# Altium PCB PCB1.PcbDoc
Units mil, origin at the board's own origin, x right, y up, seen from the top; angles counter-clockwise.
Board outline 3130 x 3175 mil, 2 copper layers (Top Layer, Bottom Layer); 28 components, 34 nets, 112 pads, 6 vias.
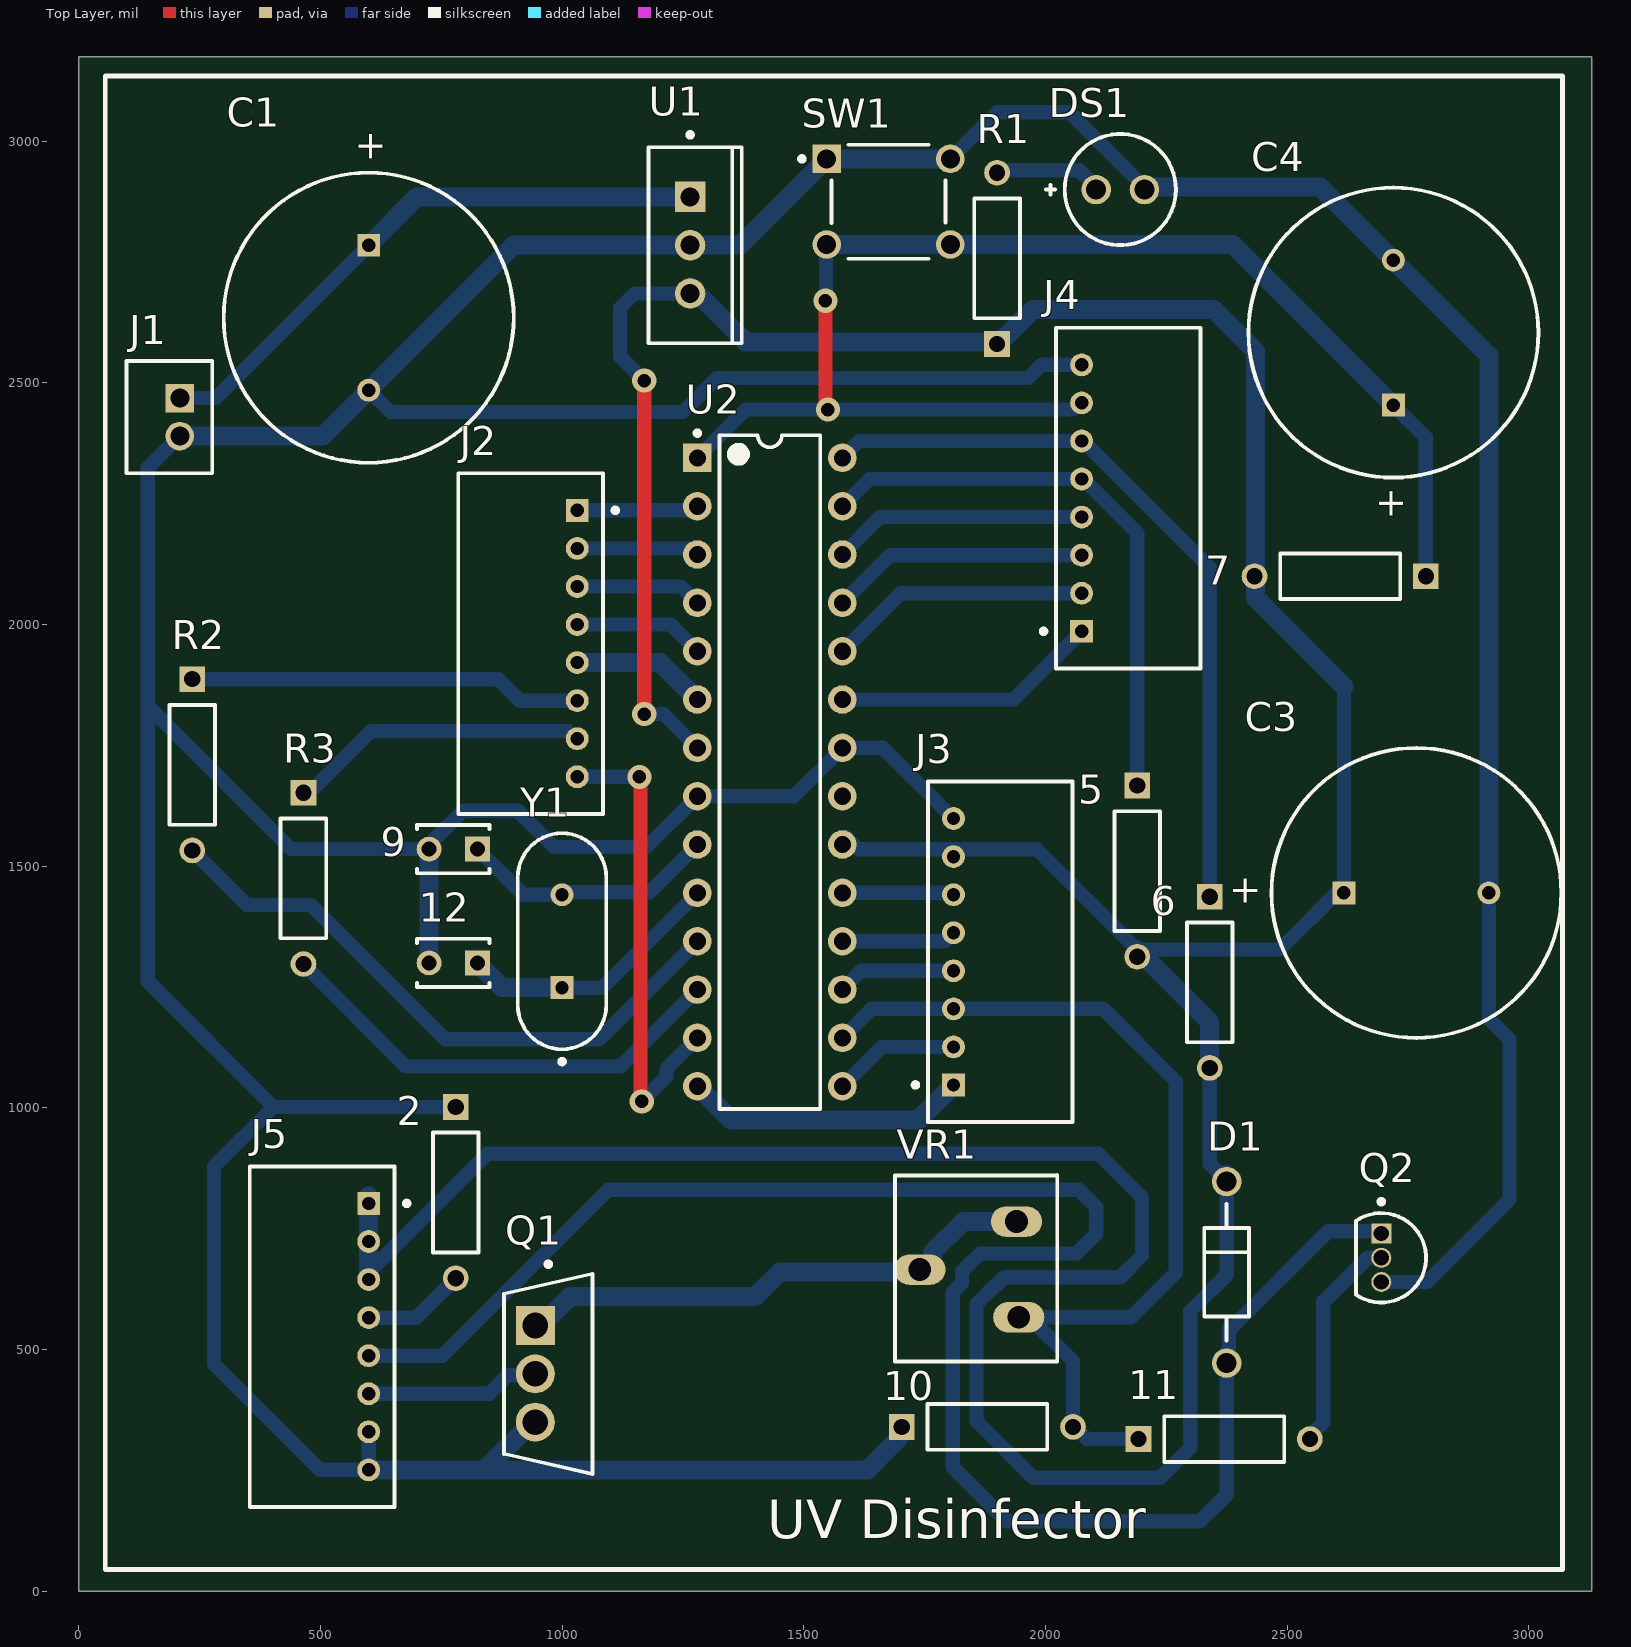
[diagram p0: Top Layer view]
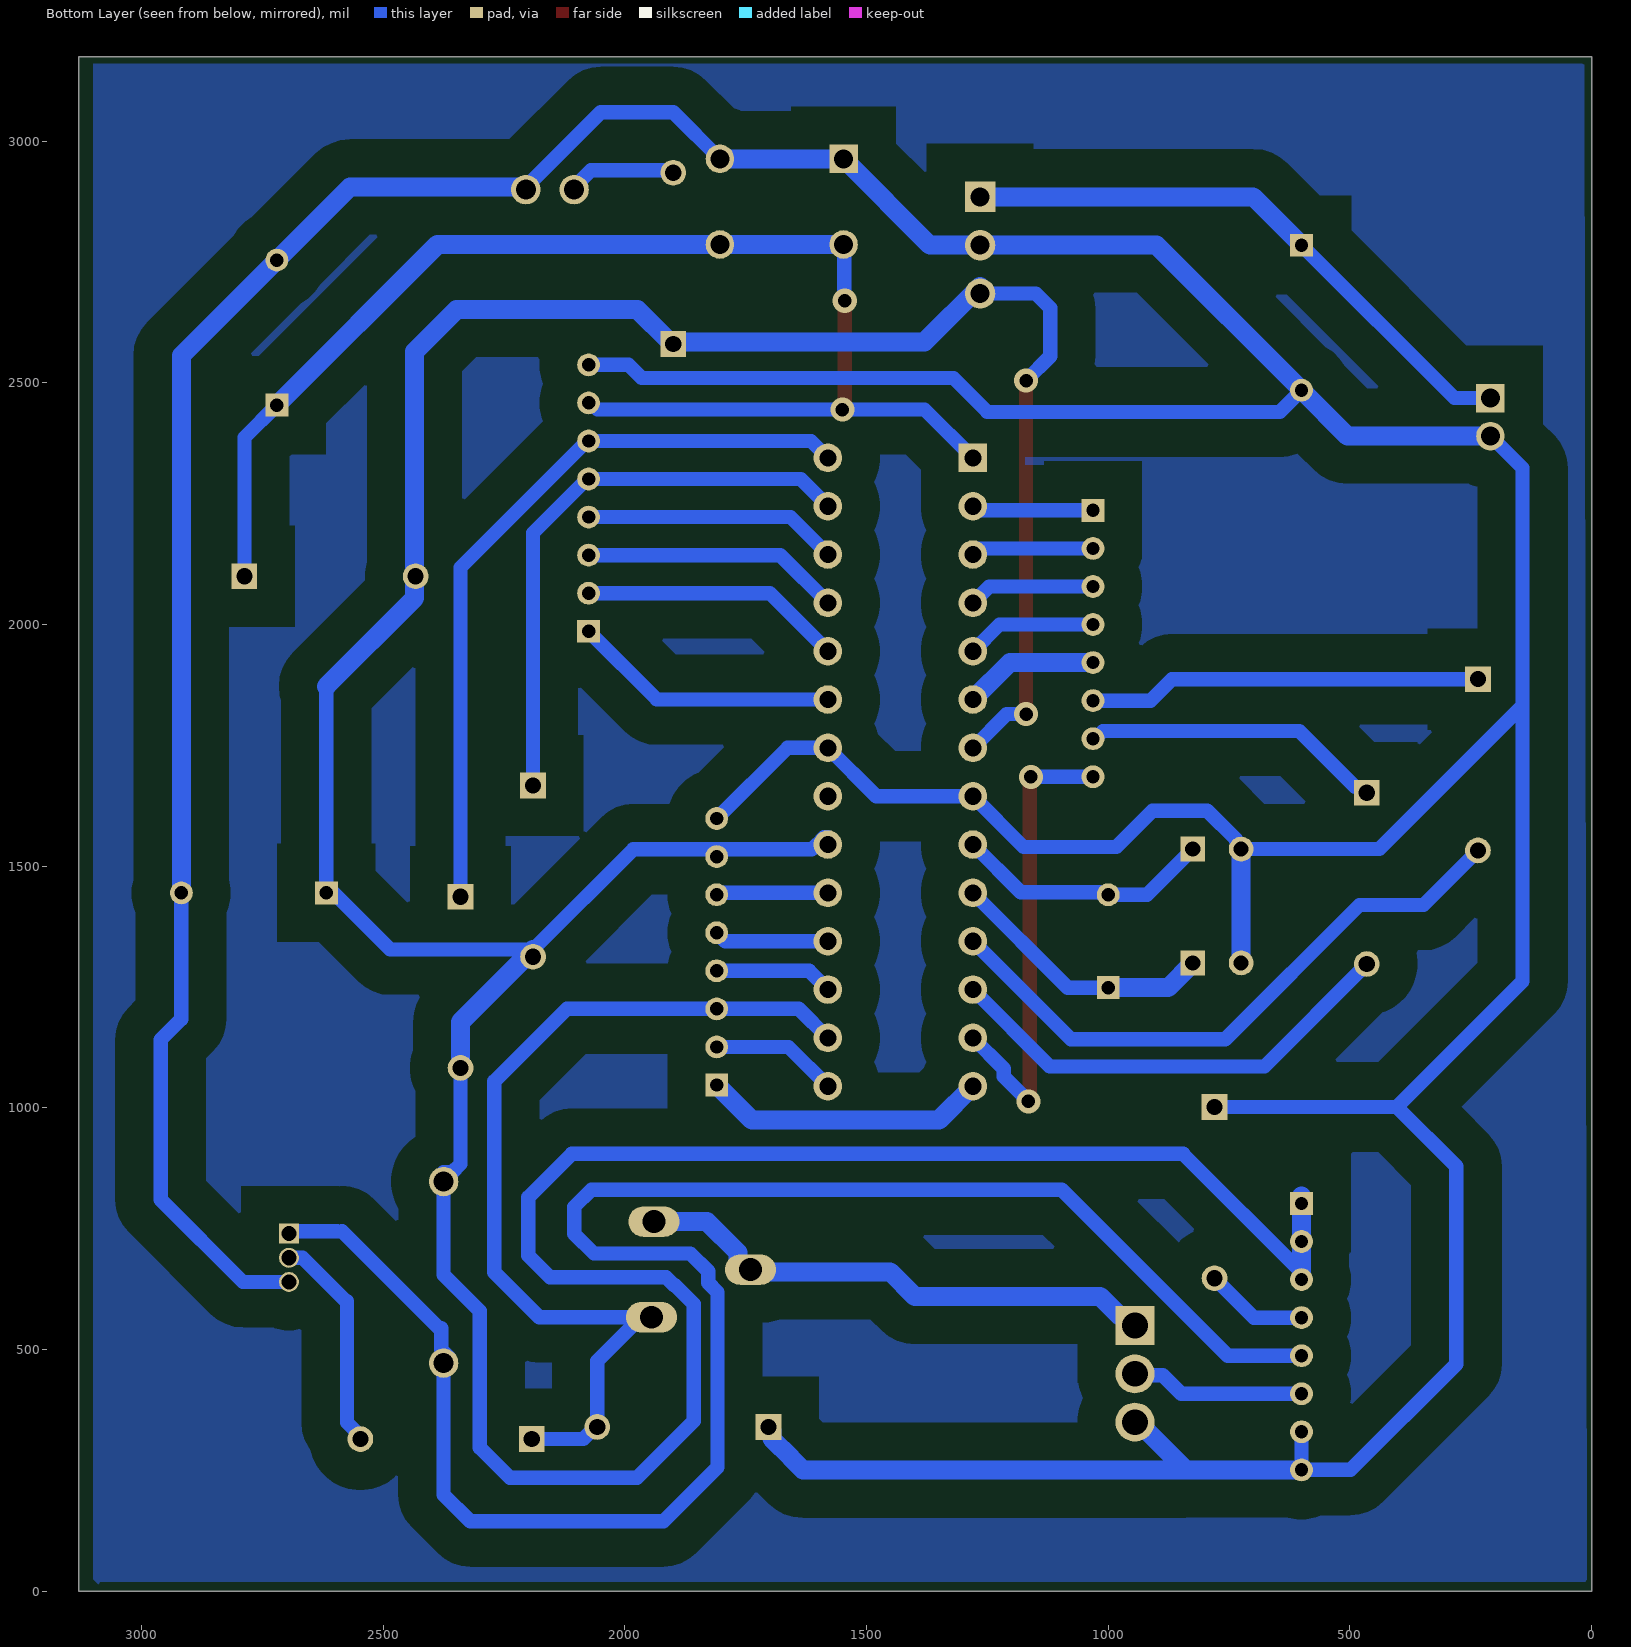
[diagram p1: Bottom Layer view, seen from below]

## Layer stack, top to bottom
Top Solder: solder mask 0.4, Solder Resist, Dk 3.5
Top Layer: signal copper 1.4
Dielectric 1: dielectric 12.6, FR-4, Dk 4.8
Bottom Layer: signal copper 1.4
Bottom Solder: solder mask 0.4, Solder Resist, Dk 3.5

## Board outline
0,0 3130,0 3130,3175 0,3175

## Design rules (kind name [scope] priority, off if disabled: settings)
Clearance [All] p1: gap=19.68 ignorepadtopadclearanceinfootprint=FALSE
PolygonConnect [All] p1: connectstyle=Relief reliefconductorwidth=10 reliefentries=4 polygonreliefangle="90 Angle" airgapwidth=10
RoutingVias [All] p1: holewidth=28 width=50 viastyle="Through Hole" minholewidth=28 minwidth=50 maxholewidth=28 maxwidth=50
SolderMaskExpansion [All] p1: expansion=4 istentingtop=FALSE
Width [All] p1: maxlimit=39.37 minlimit=19.68 preferedwidth=29.53
30 further rules are at their usual default settings.

## Classes and differential pairs
component class UV_Sheet1: 5 6 7 9 10 11 12 C1 C3 C4 D1 DS1 J1 J2 J3 J4 J5 Q1 R1 R2 R3 SW1 U1 U2 VR1 Y1

## Components (designator, comment, footprint, x,y, rotation, side; value= is the part's Value field where it differs from the comment)
2 "MFR-25FBF52-100K" RESA60-630X240 780,825 r270 top
5 "MFR-25FBF52-100K" RESA60-630X240 2190,1490 r270 top
6 "MFR-25FBF52-100K" RESA60-630X240 2340,1260 r270 top
7 "MFR-25FBF52-100K" RESA60-630X240 2610,2100 r180 top
9 "C315C220K1G5TA" KEMT-C315-THT-2 775,1535.65 r180 top
10 "MFR-25FBF52-100K" RESA60-630X240 1880,340 r0 top
11 "MFR-25FBF52-100K" RESA60-630X240 2370,315 r0 top
12 "C315C220K1G5TA" KEMT-C315-THT-2 775,1300 r180 top
C1 "Cap Pol1" RB7.6-15 600,2635 r90 top value=330nf
C3 "Cap Pol1" RB7.6-15 2767.59,1445 r180 top value=100nF
C4 "Cap Pol1" RB7.6-15 2720,2604.09 r270 top value=10uF
D1 "1N4001" ONSC-AXIAL_LEAD-2-59-10_P 2375,660 r270 top
DS1 "HLMP-4740" AVAG-HLMP-4740 2155,2900 r0 top
J1 "B2B-PH-K-S(LF)(SN)" JST-B2B-PH-K-S_V 187.55,2429.37 r270 top
J2 "S8B-PH-K-S(LF)(SN)" FP-S8B-PH-K-S_LF_SN-MFG 935,1960.82 r90 top
J3 "S8B-PH-K-S(LF)(SN)" FP-S8B-PH-K-S_LF_SN-MFG 1906.46,1323.15 r270 top
J4 "S8B-PH-K-S(LF)(SN)" FP-S8B-PH-K-S_LF_SN-MFG 2171.5,2261.85 r270 top
J5 "S8B-PH-K-S(LF)(SN)" FP-S8B-PH-K-S_LF_SN-MFG 503.54,526.85 r90 top
Q1 "IRF530PBF" FP-X15-0364-MFG 971.59,450 r0 top
Q2 "BC547B" ONSC-TO-92-3-29-11 2695,690 r270 top
R1 "MFR-25FBF52-100K" RESA60-630X240 1900,2757.83 r90 top
R2 "MFR-25FBF52-100K" RESA60-630X240 235,1710 r270 top
R3 "MFR-25FBF52-100K" RESA60-630X240 465,1475 r270 top
SW1 "1825910-6" TECO-1825910-6_V 1675.42,2875 r0 top
U1 "MC7805CTG" ONSC-TO-220-3-221AB-01 1265,2785 r0 top
U2 "ATmega328-PU" 28P3 1430,1695 r0 top
VR1 "VRes" VerRes 1852.4,516.97 r90 top
Y1 "FOXSLF/080-20" FOX-FOXSLF080-20 1000,1345 r90 top

## Footprints (in the part's own frame and the unit in brackets; to place one, negate y for a bottom-side part, rotate by r counter-clockwise, add the part's x,y. Pads: shape width x height; smd on the part's side, far side on the other; paste and mask are expansions set on the pad)
28P3 [mm] "28-Pin Plastic Dual In-Line Package (PDIP)"
  rect 1.5x1.5 hole 0.9: 1(-3.81,16.51)
  round 1.5 hole 0.9: 2(-3.81,13.97) 3(-3.81,11.43) 4(-3.81,8.89) 5(-3.81,6.35) 6(-3.81,3.81) 7(-3.81,1.27) 8(-3.81,-1.27) 9(-3.81,-3.81) 10(-3.81,-6.35) 11(-3.81,-8.89) 12(-3.81,-11.43) 13(-3.81,-13.97) 14(-3.81,-16.51) 15(3.81,-16.51) 16(3.81,-13.97) 17(3.81,-11.43) 18(3.81,-8.89) 19(3.81,-6.35) 20(3.81,-3.81) 21(3.81,-1.27) 22(3.81,1.27) 23(3.81,3.81) 24(3.81,6.35) 25(3.81,8.89) 26(3.81,11.43) 27(3.81,13.97) 28(3.81,16.51)
  silkscreen extent -3.93,-17.7 2.65,17.93, body extent -3.6,-17.65 3.6,17.65, height 4.58
AVAG-HLMP-4740 [mm] "THD, 2-Leads, Dia 5.845mm, Pitch 2.54mm"
  round 1.55 hole 1.05: 1(-1.27,0) 2(1.27,0)
  silkscreen extent -3.92,-2.92 2.92,2.92
FOX-FOXSLF080-20 [mm] "THD, 2-Leads, Body 11.35x4.65mm"
  rect 1.2x1.2 hole 0.7: 1(-2.44,0)
  round 1.2 hole 0.7: 2(2.44,0)
  silkscreen extent -6.45,-2.33 5.67,2.33, body extent -5.68,-2.33 5.68,2.33, height 3.6
FP-S8B-PH-K-S_LF_SN-MFG [mm]
  rect 1.2x1.2 hole 0.7 paste-1000 mask+0: 1(7,-2.45)
  round 1.2 hole 0.7 paste-1000 mask+0: 2(5,-2.45) 3(3,-2.45) 4(1,-2.45) 5(-1,-2.45) 6(-3,-2.45) 7(-5,-2.45) 8(-7,-2.45)
  silkscreen extent -8.95,-4.58 8.95,3.8, body extent -9.05,-3.9 9.05,3.9, height 0.25
FP-X15-0364-MFG [mm]
  rect 2.05x2.05 hole 1.35 paste-1000 mask+0: 1(-0.685,2.54)
  round 2.05 hole 1.35 paste-1000 mask+0: 2(-0.685,0) 3(-0.685,-2.54)
  silkscreen extent -2.33,-5.26 2.33,5.88, body extent -2.42,-5.36 2.42,5.36, height 0.25
JST-B2B-PH-K-S_V [mm] "Connector, 2-Leads, Body 5.9x4.5mm, Pitch 2mm"
  rect 1.5x1.5 hole 1: 1(-1,0.55)
  round 1.5 hole 1: 2(1,0.55)
  silkscreen extent -2.95,-2.25 2.95,2.25, body extent -2.95,-2.25 2.95,2.25, height 6
KEMT-C315-THT-2 [mm] "THD, 2-Leads, Body 3.81x2.54mm"
  rect 1.3x1.3 hole 0.8: 1(-1.27,0)
  round 1.3 hole 0.8: 2(1.27,0)
  silkscreen extent -1.91,-1.27 1.91,1.27, body extent -1.91,-1.27 1.91,1.27, height 4.66
ONSC-AXIAL_LEAD-2-59-10_P [mm] "AXIAL, 2-Leads, Diameter 2.35mm"
  round 1.55 hole 1.05: 1(-4.77,0) 2(4.77,0)
  silkscreen extent -3.6,-1.18 3.6,1.18
ONSC-TO-92-3-29-11 [mm] "TO, 3-Leads, Body Dia 4.7mm, Pitch 1.27mm"
  rect 1.05x1.05 hole 0.8: 1(-1.27,0)
  round 1.05 hole 0.8: 2(0,0) 3(1.27,0)
  silkscreen extent -3.07,-1.34 2.35,2.35, body extent -2.35,-1.33 2.36,2.36, height 7.87
ONSC-TO-220-3-221AB-01 [mm] "FM, 3-Leads, Body 10.3x4.85mm, Pitch 2.54mm"
  rect 1.6x1.6 hole 1: 1(0,2.54)
  round 1.6 hole 1: 2(0,0) 3(0,-2.54)
  silkscreen extent -2.19,-5.15 2.72,5.92, body extent -2.16,-5.15 2.69,5.15, height 19.68
RB7.6-15 [mm] "Polarized Capacitor (Radial); 2 Leads"
  rect 1.2x1.2 hole 0.7: 1(3.81,0)
  round 1.2 hole 0.7: 2(-3.81,0)
  silkscreen extent -7.62,-7.62 7.62,7.62
RESA60-630X240 [mm] "Axial Resistor, 2-Leads, Dia 2.4mm, Body Length 6.3mm"
  rect 1.35x1.35 hole 0.85: 1(-4.5,0)
  round 1.35 hole 0.85: 2(4.5,0)
  silkscreen extent -3.15,-1.2 3.15,1.2, body extent -3.15,-1.2 3.15,1.2, height 2.4
TECO-1825910-6_V [mm] "Switch, 4-Leads, Body 5.99x5.99mm"
  rect 1.5x1.5 hole 0.99: 1(-3.25,2.25)
  round 1.5 hole 0.99: 2(3.25,2.25) 3(-3.25,-2.25) 4(3.25,-2.25)
  silkscreen extent -4.67,-3 2.99,3, body extent -3,-2.99 2.99,3, height 5
VerRes [mm]
  oval 1.6x2.692 hole 1.2: 1(1.275,-2.35) 2(3.775,2.85) 3(6.3,-2.225)
  silkscreen extent -1.05,-4.38 8.75,4.15, body extent 0.5,-3.52 7,3.52, height 7.41

## Part data
2 5 6 7 10 11 R1 R2 R3: library part CMP-1659-00073-1, "Axial Resistor, 100 KOhm, +/- 1%, 0.25 W, -55 to 155 degC, 2-Pin THD, RoHS, Bulk", Case\Package=Axial, Max Operating Temperature="155 degC", Min Operating Temperature="-55 degC", Package Quantity=200, Power Rating="250 mW", Resistance="475 Ohm", Tolerance=1%, Voltage Rating="250 V", ComponentLink1Description="Manufacturer URL", ComponentLink1URL=http://www.yageo.com/, ComponentLink2Description=Datasheet, ComponentLink2URL=http://www.yageo.com/documents/recent/Yageo%20LR_MFR_2013.pdf, DatasheetVersion=Apr-13, Length="0.248 inch", Mount="Through Hole", PackageDescription="2-Pin Axial Lead, Dia 2.4 mm, Body Length 6.3 mm", PackageReference=MFR-25, Packaging=Bulk, RoHSCompliant=true
9 12: library part CMP-1664-00008-1, "Capacitor, Ceramic, 22 pF, +/-10 %, 100 V, -55 to 125 degC, 2-Pin THD, RoHS, Bulk", Case\Package=TO-220, Max Input Voltage="40 V", Max Operating Temperature="125 degC", Max Ouput Current="1.5 A", Min Input Voltage="4.2 V", Min Operating Temperature="0 degC", Output Voltage="1.2 V", Package Quantity=50, ComponentLink1Description="Manufacturer URL", ComponentLink1URL=http://www.kemet.com/, ComponentLink2Description=Datasheet, ComponentLink2URL=http://capacitoredge.kemet.com/capedge2/DataSheet/Datasheet-C315C220K1G5TA.pdf?pn=C315C220K1G5TA{BULK}, DatasheetVersion=Aug-16, Height="9.28 mm", Length="10.28 mm", Mount="Through Hole", Output Current="1.5 A", Outputs=1, PackageDescription="2-Pin Through Hole Device, Body 3.81 x 2.54 mm", PackageReference=C315-THT-2, Packaging=Rail/Tube, Pins=3, Radiation Hardening=No, REACH SVHC="No SVHC", RoHSCompliant=true, Weight="0.08113 oz", Width="4.82 mm"
C1 C3 C4: "Polarized Capacitor (Radial)", LatestRevisionDate=17-Jul-2002, LatestRevisionNote="Re-released for DXP Platform.", PackageDescription="Polarized Capacitor (Radial); 2 Leads", PackageReference=RB7.6-15, Published=8-Jun-2000, Publisher="Altium Limited"
D1: library part CMP-0902-00117-1, "Standard Recovery Rectifier, 2-Pin Axial_Lead, Pb-Free, Bulk Bag", Manufacturer="On Semiconductor", ComponentLink1Description="Manufacturer URL", ComponentLink1URL=http://www.onsemi.com/, ComponentLink2Description=Datasheet, ComponentLink2URL=http://www.onsemi.com/pub_link/Collateral/1N4001-D.PDF, ComponentLink3Description="Package Specification", ComponentLink3URL=http://www.onsemi.cn/pub_link/Collateral/59-10.PDF, DatasheetVersion="Rev. 13", IFSM Max (A)=30, IO(rec) Max (A)=1, Mounting Technology="Through Hole", PackageDescription="2-Pin, Axial Lead, Diameter 2.35 mm", PackageReference=AXIAL_LEAD-2-59-10, PackageVersion="Rev. U, 02/2005", Packing="Bulk Bag", PartNumber=1N4001, RoHS=TRUE, Type="Standard Recovery", VRRM Max (V)=50
DS1: library part CMP-2000-06413-1, "T-1 3/4 (5 mm) Low Current LED Lamp, Green, 1.9 V, -20 to 100 degC, 2-Pin THD, RoHS, Bulk", Color=Green, Dominant Wavelength/Color Temperature=569nm, Manufacturer=AvagoTechnologies, Package=2T-13/4, Package Description="2-Pin Through Hole Device, Dia 5.845 mm, Pitch 2.54 mm", Category=LEDs, Datasheet URL=http://docs.avagotech.com/docs/AV02-1557EN, Datasheet Version=07/2014, Intensity=2.3mcd, Lens Appearance=ColoredDiffused, Lens Shape Type=Circular, Manufacturer URL=http://www.avagotech.com/, Mounting=ThroughHole, Mounting Orientation=TopMount, Mounting Technology=ThroughHole, Number of LEDs=1, Package Reference=HLMP-4740, Packaging=Bulk, Peak Wavelength=565nm, Pin Count=2, Rad Hard=No, Type=Uni-Color, Viewing Angle=50°
J1: library part CMP-2000-05162-1, "Male Header, Pitch 2 mm, 1 x 2 Position, Height 6 mm, Tail Length 3.4 mm, -25 to 85 degC, RoHS, Bulk", Manufacturer=JST, Datasheet URL=http://datasheet.octopart.com/B2B-PH-K-S%28LF%29%28SN%29-JST-datasheet-8324864.pdf, Datasheet Version=Nov-08, Manufacturer URL=http://www.jst.com/home2.html, No of Positions=2, Pitch=2mm, Style/Orientation=StraightHeader/Plug, Termination=Crimp, Type=ShroudedHeader
J2 J3 J4 J5: library part CMP-17439-000161-1, "CONN HEADER R/A 8POS 2MM", Color=White, Contact Resistance=20mR, Current Rating=2A, Flammability Rating="UL94 V-0", Insulation Color=Natural, Insulation Resistance=1GR, Max Operating Temperature=85°C, Max Voltage Rating (AC)=100V, Min Operating Temperature=-25°C, Connector Type=Header, Contact Finish - Mating=TIN, Contact Material=Brass, Contact Mating Length=0.13inch, Contact Plating=Tin, Contact Shape=Square, Contact Type="Male Pin", Depth=7.6mm, Fastening Type=Detent, Gender=Male, Height=9.4mm, Housing Color=White, Housing Material=Polyamide, Insulation Material=Nylon, Lead Free="Lead Free", Lead Pitch=2mm, Length=17.9mm, Max Current Rating=2A, Mount="Through Hole", Number of Contacts=8, Number of Pins=8, Number of Poles=8, Number of Positions=8, Number of Rows=1, Orientation="Right Angle", Packaging=Bulk, Pitch=2mm, REACH SVHC="No SVHC", Series=PH, Termination=Solder, Voltage Rating=100V, Voltage Rating (AC)=100V, Width=4.5mm, Working Voltage=100V
Q1: library part CMP-02550-000190-1, "MOSFET N-CH 100V 14A TO-220AB", Continuous Drain Current=14A, Drain To Source Breakdown Voltage=100V, Drain To Source Resistance=0.16Ω, Gate To Source Voltage=20V, Input Capacitace At Vds="670pF @ 25V", Manufacturer=Vishay, Max Forward Diode Voltage=2.5V, Max Junction Temp=+175°C, Package=X15-0364, Power Dissipation=88W, Pulse Drain Current=56A, Temperature="-55°C to +175°C", Temperature Range Low=-55°C, Automotive=No, Category=Trans, ComponentLink2Description=Datasheet, ComponentLink2URL=http://www.vishay.com/docs/91019/91019.pdf, Depletion Mode=False, Device Class L1="Discrete Semiconductors", Device Class L2=Transistors, Device Class L3=MOSFETs, Digikey Description="MOSFET N-CH 100V 14A TO-220AB", Drain To Source Voltage=100V, Gate Charge At Vgs="26nC @ 10V", Height=19.89mm, Lead Free=Yes, Manufacturer Part Number=IRF530PBF, Mouser Description="MOSFET N-Chan 100V 14 Amp", Number Of Channels=1, Number Of N Channels=1, Octopart=https://octopart.com/irf530pbf-vishay-46547999, Reverse Recovery Charge=850nC, Reverse Recovery Time=150ns, RoHS=TRUE, Rthja Max=62°C/W, Standoff Height=3.33mm, Temperature Range High=+175°C, Threshold Vgs Max=4V, Threshold Vgs Min=2V, Turn Off Delay Time=23ns, Turn On Delay Time=10ns
Q2: library part CMP-1048-01467-1, "Amplifier Transistor, NPN Silicon, 3-Pin TO-92, Bulk Box", Manufacturer="On Semiconductor", ComponentLink1Description="Manufacturer URL", ComponentLink1URL=http://www.onsemi.com/, ComponentLink2Description=Datasheet, ComponentLink2URL=http://www.onsemi.com/pub_link/Collateral/BC546-D.PDF, ComponentLink3Description="Package Specification", ComponentLink3URL=http://www.onsemi.cn/pub_link/Collateral/2N6426-D.PDF, DatasheetVersion="Rev. 7", fT Min (MHz)=150, IC Continuous (A)=0.1, Mounting Technology="Through Hole", PackageDescription="3-Pin Transistor Outline, Body 4.825 x 3.685 mm, Pitch 1.27 mm", PackageReference=TO-92-3-29-11_AM_SL, PackageVersion="Rev. AM", Packing="Bulk Box", PartNumber=BC547B, Polarity=NPN, RoHS=FALSE
SW1: library part CMP-1684-00021-1, "Tact Switch, SPST-NO, 0.05 A, -35 to 85 degC, 4-Pin THD, RoHS, Bulk", Actuator Color=Black, Contact Rating @ Voltage=0.05A@24VDC, Dielectric Strength=500VAC, Manufacturer="TE Connectivity", Maximum AC Voltage Rating=N/A, Maximum Contact Resistance=100mOhm, Maximum DC Voltage Rating=24V, Minimum Insulation Resistance=100MOhm, Operating Temperature=-35to85C, Package Description="4-Pin Through Hole Device, Body 5.99 x 5.99 mm, Pitch 6.5 mm", Package Reference=THD, Actuator Length=1.4mm, Actuator Material=PolybutyleneTerephthalate, Actuator Style=RoundButton, Base Material=N/A, Body Orientation=Straight, Bushing Type=Unthreaded, Contact Material=CopperAlloy, Contact Plating=Silver, Datasheet URL=http://www.te.com/commerce/DocumentDelivery/DDEController?Action=showdoc&DocId=Customer+Drawing%7F1825910%7FC9%7Fpdf%7FEnglish%7FENG_CD_1825910_C9.pdf%7F1825910-6, Datasheet Version="Rev. C9", Dimension=5.99x5mm, Electrical Life=100000Cycles, Family=1825910, Function=MomentaryContact, Housing Material=N/A, Illumination=N/R, Manufacturer URL=http://www.te.com, Mechanical Life=100000Cycles, Mounting=ThroughHole, Packaging=N/A, Part No=1825910-6, Pole Throw Configuration=SPST, Product Weight=N/A, RoHS=Yes, Seal Description=N/A, Seal Location=N/A, Switch Configuration=OFF(ON), Terminal Type=PCPins, Thread Size=N/R
U1: library part CMP-2000-04928-1, "Positive Voltage Regulator, 1 A, 5 V, 0 to 125 degC, 3-Pin TO-220, RoHS, Tube", Current, Output, Maximum=1A, Current, Quiescent Supply=6.5mA, Current, Supply=3.2mA, Dropout Voltage=2V, Manufacturer="ON Semiconductor", Package Description="3-Pin Flange Mount, Vertical Straight Lead, Body 9.97 x 4.445 mm, Pitch 2.54 mm", Package Reference=TO-220-3-221AB-01, Package Type=TO-220, Package Version="Rev. A, 11/2010", Resistance, Thermal, Junction to Case=5degC/W, Temperature, Operating, Maximum=+125degC, Temperature, Operating, Minimum=0degC, Temperature, Operating, Range=0to+125degC, Voltage, Input Range=Maximumof35V, Voltage, Input, High Level=35V, Voltage, Noise=10μV/V, Voltage, Output=5V, Datasheet URL=http://www.onsemi.com/pub_link/Collateral/MC7800-D.PDF, Datasheet Version="Rev. 27, 11/2014", Dimensions=10.28x4.82x15.75mm, Dropout Voltage Measurement Current=1A, Height=15.75mm, Length=10.28mm, Line Regulation=20mV, Load Regulation=25mV, Manufacturer URL=http://www.onsemi.com/, Mounting Type=ThroughHole, Number of Outputs=1, Number of Pins=3, Output Type=Fixed, Polarity=Positive, Regulation, Line=0.5mV, Regulation, Load=1.3mV, Regulator Function=Standard, Regulator Type=PositiveVoltageOut, Type=VoltageRegulator, Voltage, Dropout=2V, Voltage, Supply=35V, Width=4.82mm
U2: library part CMP-0095-00015-2, "8-bit AVR Microcontroller, 32KB Flash, 1KB EEPROM, 2KB SRAM, 28-pin PDIP, Industrial Grade (-40°C to 85°C)", ComponentLink1Description="Manufacturer URL", ComponentLink1URL=http://www.atmel.com/, ComponentLink2Description="ATmega48A/48PA/88A/88PA/168A/168PA/328/328P Datasheet", ComponentLink2URL=http://www.atmel.com/dyn/resources/prod_documents/8271.pdf, ComponentLink3Description="ATmega48A/48PA/88A/88PA/168A/168PA/328/328P Summary", ComponentLink3URL=http://www.atmel.com/dyn/resources/prod_documents/8271S.pdf, DatasheetVersion="revD, May-2011", PackageDescription="28-lead (0.300\"/7.62mm Wide) Plastic Dual Inline Package (PDIP)", PackageReference=28P3, PackageVersion="revB, Sep-2001", RevisionNote="DatasheetVersion updated. URLs added."
Y1: library part CMP-003-00025-2, "Resistance Weld Thru-Hole Crystal, 8 MHz, +/- 50 ppm, 10 pF, -20 to 70 degC, 2-Pin THD, RoHS, Bulk", Case/Package=FOXSLF080-20, Frequency=8MHz, Frequency Tolerance=30ppm, Load Capacitance=20pF, Manufacturer="FOX Electronics", Max Operating Temperature=70°C, Min Operating Temperature=-20°C, Package Description="2-Pin Through Hole Device, Body 11.35 x 4.65 mm", Package Quantity=100, Resistance=80Ohm, Tolerance=50ppm, Datasheet URL=http://download.siliconexpert.com/pdfs/2015/4/5/6/5/7/200/fox_/manual/35607121449963728hc49slf.pdf, Datasheet Version=Mar-15, ESR=80, Manufacturer URL=http://www.foxonline.com/, Mounting Technology=TH, Package Reference=FOXSLF080-20, Packaging=Bulk, Pins=2, RoHS Compliant=True

## Via types
v1: diameter 50, hole 28, Top Layer to Bottom Layer, 6 vias

## Nets (pads, with @x,y where several pads share a name; then routed paths per layer and width w, separated by ;. In a path a pad name is that pad's centre, name@x,y a point inside that pad or via, vN(x,y) a via of type N, cw(c..) or ccw(c..) an arc to the next point about the centre after c; other vN are vias at no path point)
+5: 5.2 6.2 7.2 C3.1 D1.1 J3.7 J5.1 J5.2 J5.3 R1.1 U1.3 U2.7 U2.20 | length 9100.3
  Top Layer w29.53: v1(1170,1815) v1(1170,2505)
  Bottom Layer w29.53: J5.3@600,659.96 845.04,905 2110,905 2200,815 2200,695 2154.84,649.84 1914.84,649.84 1898.11,633.11 1896.1,633.11 1857.47,594.48 1857.47,352.53 1975,235 2237.7,235 2300,297.3 2300,580 2375,655 D1.1 ; v1(1170,1815) 1210,1815 U2.7 ; v1(1170,2505) 1120,2555 1120,2655 1150,2685 U1.3 ; U2.20@1580,1560 1587.99,1560 1602.75,1545.24 1603.1,1545.24 1613.33,1535 1982.83,1535 2190,1327.83 2485.43,1327.83 2610.09,1452.5 2616.23,1452.5 2617.59,1453.86 2617.59,1872.41 ; 6.2@2340,1097.83 6.2 2340,884.06 2357.3,866.76 D1.1@2375,866.76
  Bottom Layer w39.37: J5.3@600,659.96 J5.2 J5.1 J5.1@600,817.44 ; U1.3@1265,2700 1380,2585 1907.17,2585 1974.17,2652 2348,2652 2435,2565 2435,2100 2435,2055 2617.59,1872.41 ; 5.2@2190,1327.83 2340,1177.83 6.2@2340,1097.83
Buzzer-: D1.2 J5.5 Q2.1 | length 3817.5
  Bottom Layer w29.53: J5.5@596.61,484.09 J5.5 752.67,487.48 1096.14,830.94 2069.06,830.94 2105,795 2105,740 2064.06,699.06 1864.69,699.06 1827.64,662.01 1827.64,638.27 1808.26,618.89 1808.26,256.74 1920,145 2320,145 2375,200 D1.2 2375,480.73 D1.2@2371.03,484.7 ; D1.2@2364.25,484.25 2380,500 2380,544.27 ; 2380.75,540.75 2585,745 ; 2595,745 Q2.1@2690,745
Cswt-: 2.2 J5.4 | length 213.8
  Bottom Layer w29.53: J5.4 698.39,566.22 2.2
GND: 2.1 9.2 10.1 12.2 C1.2 C3.2 C4.2 DS1.2 J1.2 J3.8 J4.8 J5.7 J5.8 Q1.3 Q2.3 SW1.1 SW1.2 U1.2 U2.8 U2.22 | length 13330.3
  Bottom Layer w29.53: J1.2 143.06,2323.86 143.06,1831.94 ; J5.7 J5.8 498.74,251.26 280,470 280,879.33 402.83,1002.17 ; C1.2 645,2440 1250,2440 1320,2510 1965,2510 1992.44,2537.44 J4.8 ; 2.1 402.83,1002.17 ; SW1.2 1899.79,3060 2050,3060 DS1.2@2205,2905 ; J3.8 1663.74,1745 U2.22 1480,1645 U2.8 1175,1540 983.19,1540 908.19,1615 795,1615 735.83,1555.83 735.83,1552.34 725,1541.51 9.2 439.35,1535.65 143.06,1831.94 ; Q2.3 2790,640 2960,810 2960,1141.4 2917.59,1183.81 C3.2 ; 143.06,1831.94 143.06,1261.94 402.83,1002.17
  Bottom Layer w39.37: J1.2 505,2390 C1.2 900,2785 U1.2 1368.89,2785 SW1.1 SW1.2 ; J5.8 839.29,251.26 ; 12.2 9.2 ; Q1.3@938.03,350 839.29,251.26 ; 10.1 1695.94,333.11 1695.94,315.99 1655,275.05 1655,274.32 1631.94,251.26 839.29,251.26 ; DS1.2@2205,2905 2569.09,2905 C4.2 2917.59,2556.5 C3.2
Load-: J5.6 Q1.2 | length 355.1
  Bottom Layer w29.53: J5.6 848.74,408.74 886.98,446.98 935.01,446.98 Q1.2@938.03,450
Net9_1: 9.1 U2.9 Y1.2 | length 530.4
  Bottom Layer w29.53: 9.1 919.59,1441.06 Y1.2 ; Y1.2@1006.06,1446.06 1007.67,1444.45 1015.92,1444.45 1017.53,1446.06 1181.06,1446.06 U2.9
Net11_2: 11.2 Q2.2 | length 453.8
  Bottom Layer w29.53: 11.2 2547.17,321.39 2575,349.23 2575,600 2577.05,600 2667.05,690 Q2.2
Net12_1: 12.1 U2.10 Y1.1 | length 557.4
  Bottom Layer w29.53: Y1.1 1083.94,1248.94 U2.10
  Bottom Layer w39.37: 12.1 876.06,1248.94 Y1.1
NetC1_1: C1.1 J1.1 U1.1 | length 1228.2
  Bottom Layer w29.53: J1.1 283.74,2468.74 C1.1
  Bottom Layer w39.37: C1.1 700,2885 U1.1
NetDS1_1: DS1.1 R1.2 | length 197.8
  Bottom Layer w29.53: R1.2@1921.7,2940 2070,2940 DS1.1@2105,2905
NetJ2_6: J2.6 R2.1 | length 814.9
  Bottom Layer w29.53: R2.1 867.83,1887.17 912.29,1842.71 J2.6
NetJ2_7: J2.7 R3.1 | length 626
  Bottom Layer w29.53: R3.1 476.81,1663.98 488.98,1663.98 605,1780 1010.63,1780 1026.66,1763.97 J2.7
NetQ1_1: Q1.1 VR1.2 VR1.3 | length 1097
  Bottom Layer w29.53: Q1.1 Q1.1@944.62,556.59
  Bottom Layer w39.37: Q1.1@938.03,550 944.62,556.59 958.7,570.67 977.43,570.67 1016.76,610 1400,610 1451.07,661.07 1735.68,661.07 VR1.2 ; VR1.2@1755.31,665.59 1766.22,676.5 1766.22,701.22 1830,765 VR1.3
PB0: J3.1 U2.14 | length 589.1
  Bottom Layer w39.37: U2.14 1350,975 1737.44,975 J3.1
PB1: J3.2 U2.15 | length 263.7
  Bottom Layer w29.53: U2.15 1661.3,1126.3 J3.2
PB2: 10.2 11.1 J3.3 U2.16 VR1.1 | length 1946.3
  Bottom Layer w29.53: U2.16 1640.04,1205.04 J3.3 2119.96,1205.04 2270,1055 2270,660 2177.17,567.17 VR1.1@1966.43,567.17 ; VR1.1 VR1.1@1966.43,567.17 ; 11.1 2086.27,315 2061.27,340 10.2 2057.17,476.43 VR1.1@1966.43,567.17
PB3: J3.4 U2.17 | length 246.1
  Bottom Layer w29.53: U2.17 1618.78,1283.78 J3.4
PB4: J3.5 U2.18 | length 237.3
  Bottom Layer w29.53: U2.18 1792.48,1345 J3.5
PB5: J3.6 U2.19 | length 231.5
  Bottom Layer w29.53: U2.19 1806.26,1445 J3.6
PC0: J4.1 U2.23 | length 553.6
  Bottom Layer w29.53: U2.23 1933.78,1845 J4.1
PC1: J4.2 U2.24 | length 544.7
  Bottom Layer w29.53: U2.24 1700,2065 J4.2
PC2: J4.3 U2.25 | length 535.9
  Bottom Layer w29.53: U2.25 1678.74,2143.74 J4.3
PC3: J4.4 U2.26 | length 527.1
  Bottom Layer w29.53: U2.26 1657.48,2222.48 J4.4
PC4: 5.1 J4.5 U2.27 | length 1202
  Bottom Layer w29.53: U2.27 1636.22,2301.22 J4.5 2078.42,2301.22 2190,2189.64 5.1
PC5: 6.1 J4.6 U2.28 | length 1564
  Bottom Layer w29.53: U2.28 1614.96,2379.96 J4.6 2078.42,2379.96 2340,2118.38 6.1
PC6: 7.1 C4.1 J4.7 SW1.3 SW1.4 U2.1 | length 2878.7
  Top Layer w29.53: v1(1545,2670) 1545,2455.54 1550,2450.54 v1(1550,2445)
  Bottom Layer w29.53: U2.1 1380,2445 2056.55,2445 2070.25,2458.7 J4.7 ; v1(1545,2670) 1546.24,2671.24 1546.24,2785.18 SW1.3 ; C4.1 2787.17,2386.92 7.1
  Bottom Layer w39.37: SW1.3 SW1.4 2387.67,2786.42 C4.1
PD0: J2.1 U2.2 | length 252.1
  Bottom Layer w29.53: J2.1 1271.41,2236.41 U2.2
PD1: J2.2 U2.3 | length 253.8
  Bottom Layer w29.53: J2.2 1267.33,2157.67 U2.3
PD2: J2.3 U2.4 | length 262.6
  Bottom Layer w29.53: J2.3 1246.07,2078.93 U2.4
PD3: J2.4 U2.5 | length 271.4
  Bottom Layer w29.53: J2.4 1224.81,2000.19 U2.5
PD4: J2.5 U2.6 | length 280.2
  Bottom Layer w39.37: J2.5 1203.55,1921.45 U2.6
PD5: R2.2 U2.11 | length 1290.9
  Bottom Layer w29.53: R2.2 347.83,1420 480,1420 757.95,1142.05 1077.05,1142.05 U2.11
PD6: R3.2 U2.12 | length 968.6
  Bottom Layer w29.53: R3.2 676.83,1086 1121,1086 U2.12
PD7: J2.8 U2.13 | length 981
  Top Layer w29.53: v1(1160,1685) 1162.5,1682.5 1162.5,1016.16 v1(1165,1013.66)
  Bottom Layer w29.53: J2.8 1159.77,1685.23 v1(1160,1685) ; v1(1165,1013.66) 1216.27,1064.93 1216.27,1081.27 U2.13
pads on no net: U2.21

## Polygon pours and split planes (outlines as drawn)
no net on Bottom Layer "NONET_L02_P000" (solid, pour order 0): 15,3165 20,3160 3100,3160 3100,25 3090,15 3085,20 10,20

## Silkscreen, mask and mechanical layers (free items; w line width, h text height)
Top Overlay:
  lines w10: 55,45 3070,45 3070,3135 55,3135 55,45
  text "UV Disinfector" at 1425,110 h80

## Text inside footprints (layer, text, board x,y; h text height)
C1: Top Overlay "+" at 629.01,2955.15 h59.06 r90
C3: Top Overlay "+" at 2447.44,1474.01 h59.06 r180
C4: Top Overlay "+" at 2690.99,2283.93 h59.06 r270